# Altium PCB LEDMiniCube_PCB.PcbDoc (part 1 of 2)
Units mm, origin at the board's own origin, x right, y up, seen from the top; angles counter-clockwise.
Board outline 80 x 80 mm, 2 copper layers (Top Layer, Bottom Layer); 142 components, 145 nets, 574 pads, 515 vias.
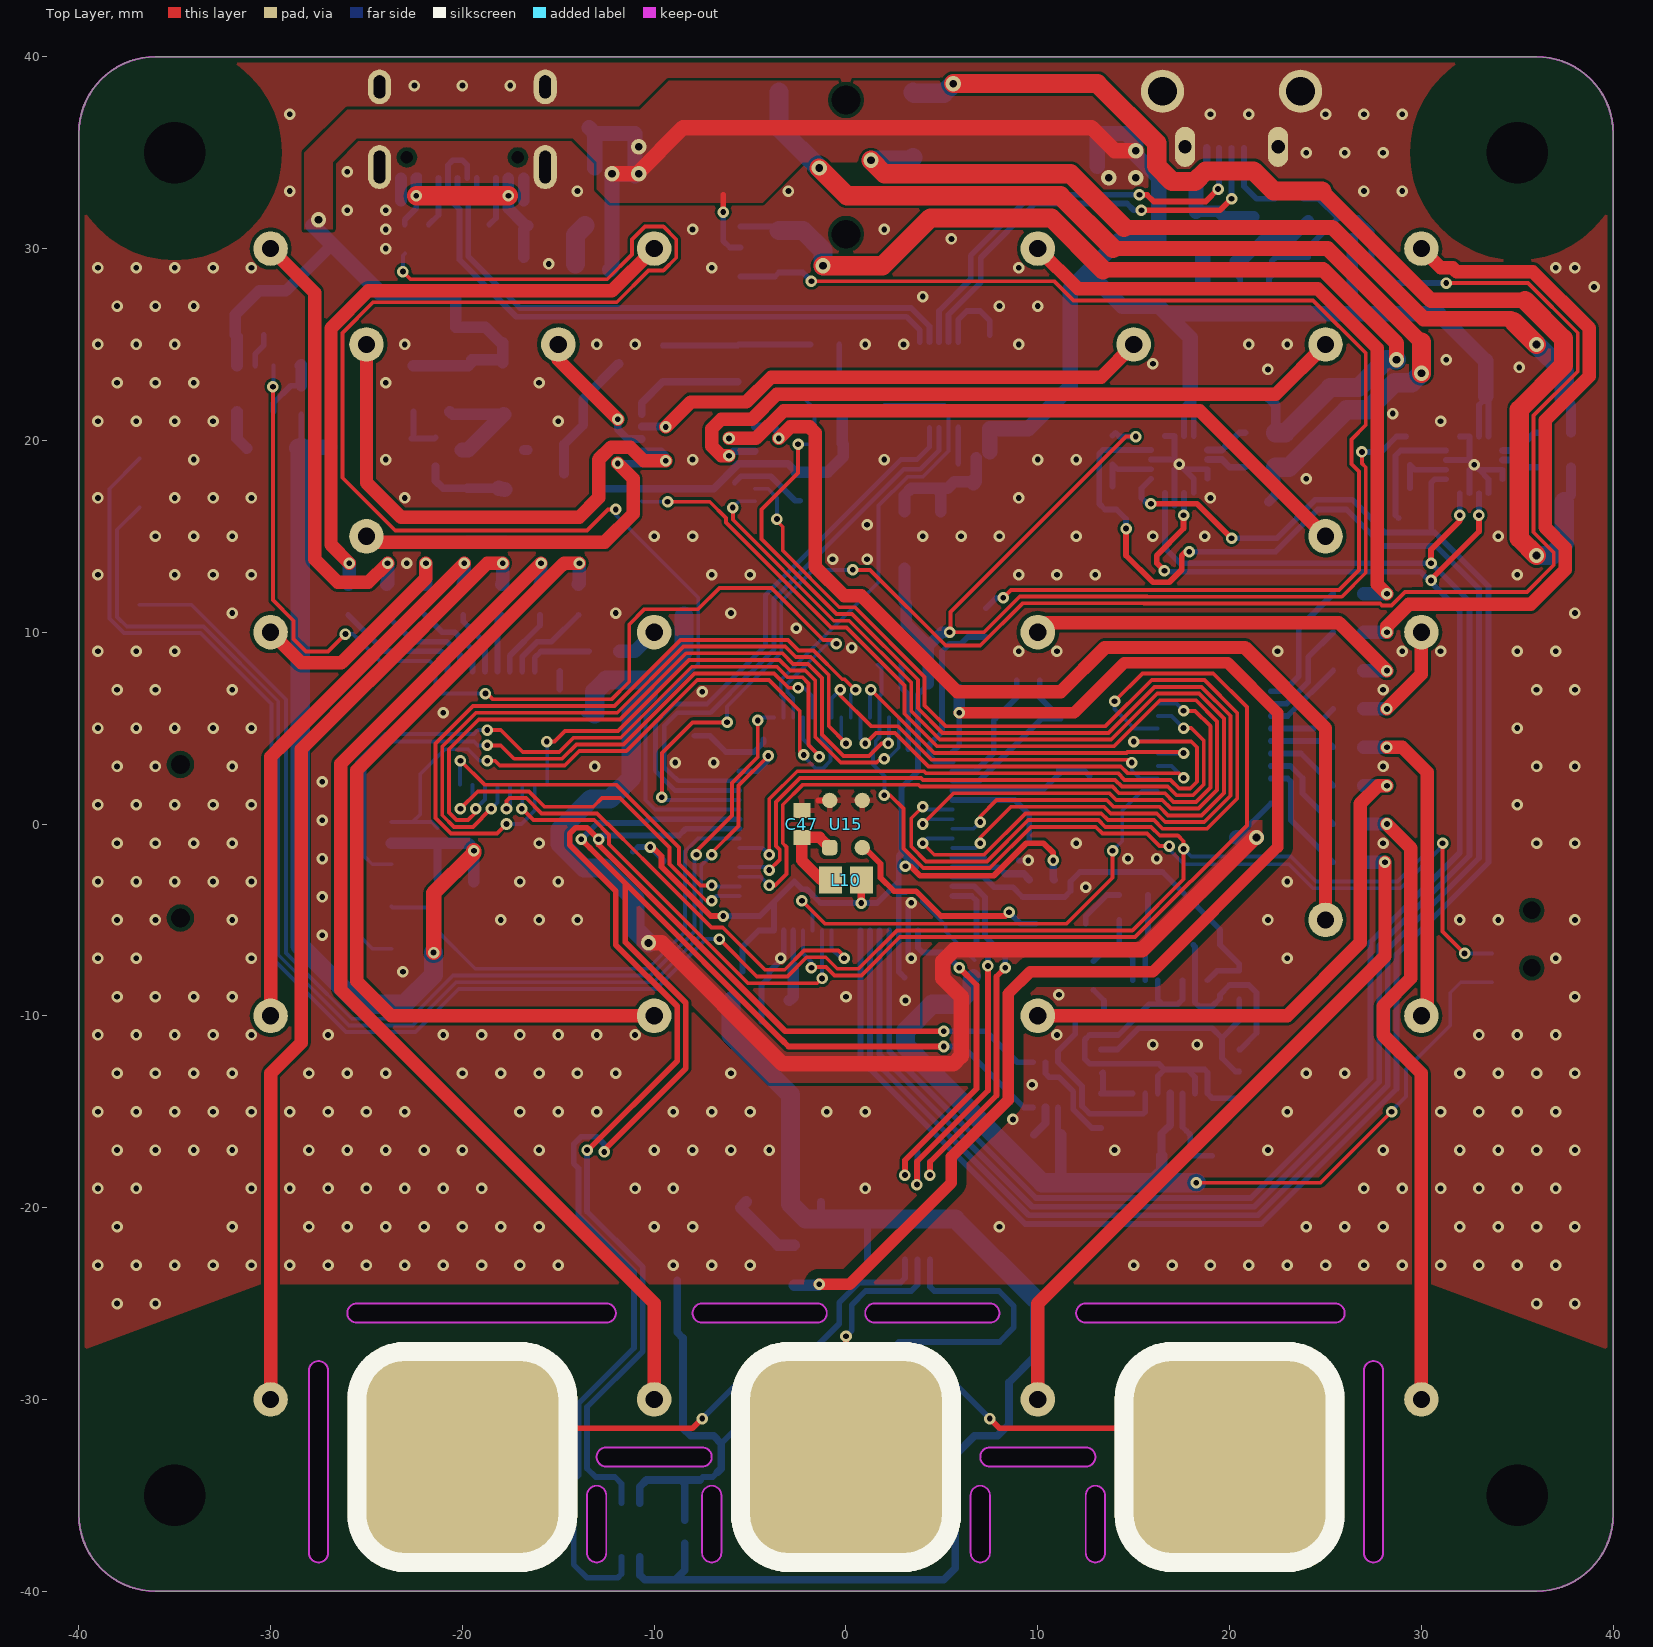
[diagram p0: Top Layer view]
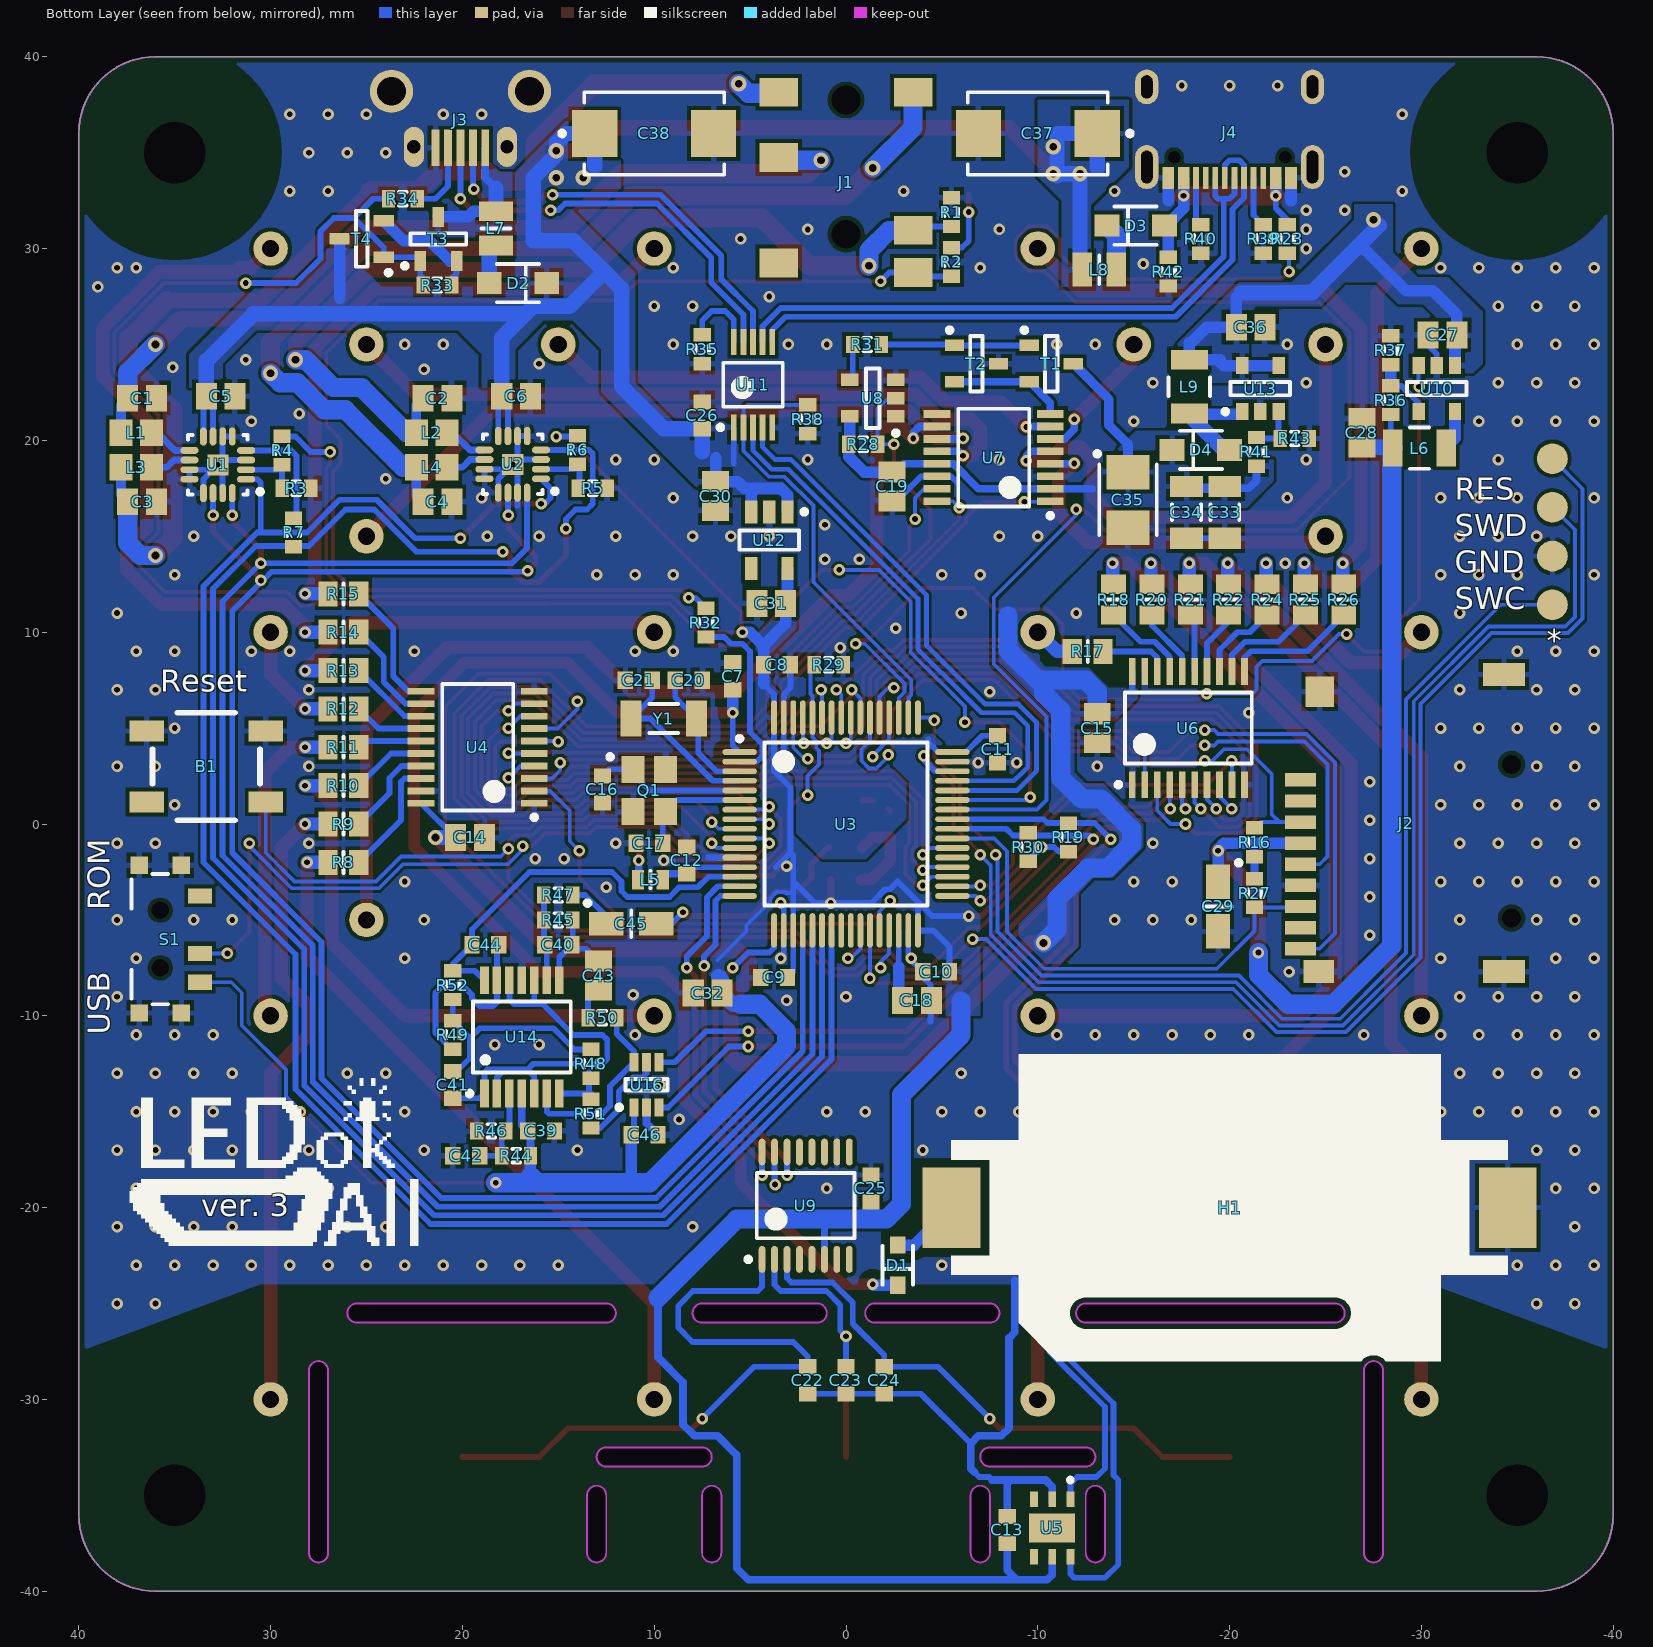
[diagram p1: Bottom Layer view, seen from below]

## Layer stack, top to bottom
Top Solder: solder mask 0.0102, Solder Resist, Dk 3.5
Top Layer: signal copper 0.0356
Dielectric 1: dielectric 0.32, FR-4, Dk 4.8
Bottom Layer: signal copper 0.0356
Bottom Solder: solder mask 0.0102, Solder Resist, Dk 3.5

## Board outline
-40,-36 ccw(c-36,-36) -36,-40 36,-40 ccw(c36,-36) 40,-36 40,36 ccw(c36,36) 36,40 -36,40 ccw(c-36,36) -40,36
cut-out: -28,-38 ccw(c-27.5,-38) -27,-38 -27,-28.5 ccw(c-27.5,-28.5) -28,-28.5
cut-out: 27,-38 ccw(c27.5,-38) 28,-38 28,-28.5 ccw(c27.5,-28.5) 27,-28.5
cut-out: -12.5,-33.5 cw(c-12.5,-33) -12.5,-32.5 -7.5,-32.5 cw(c-7.5,-33) -7.5,-33.5
cut-out: 7.5,-33.5 cw(c7.5,-33) 7.5,-32.5 12.5,-32.5 cw(c12.5,-33) 12.5,-33.5
cut-out: 1.5,-26 7.5,-26 ccw(c7.5,-25.5) 7.5,-25 1.5,-25 ccw(c1.5,-25.5)
cut-out: -7.5,-26 -1.5,-26 ccw(c-1.5,-25.5) -1.5,-25 -7.5,-25 ccw(c-7.5,-25.5)
cut-out: 12.5,-26 cw(c12.5,-25.5) 12.5,-25 25.5,-25 cw(c25.5,-25.5) 25.5,-26
cut-out: -25.5,-26 -12.5,-26 ccw(c-12.5,-25.5) -12.5,-25 -25.5,-25 ccw(c-25.5,-25.5)
cut-out: 12.5,-38 ccw(c13,-38) 13.5,-38 13.5,-35 ccw(c13,-35) 12.5,-35
cut-out: 6.5,-38 6.5,-35 cw(c7,-35) 7.5,-35 7.5,-38 cw(c7,-38)
cut-out: -7.5,-38 ccw(c-7,-38) -6.5,-38 -6.5,-35 ccw(c-7,-35) -7.5,-35
cut-out: -13.5,-38 -13.5,-35 cw(c-13,-35) -12.5,-35 -12.5,-38 cw(c-13,-38)

## Design rules (kind name [scope] priority, off if disabled: settings)
BoardOutlineClearance [All] p1: gap=0.3 ignorepadtopadclearanceinfootprint=FALSE except(0: Arc-SplitContinuation Track-SplitContinuation SMDPad-SplitContinuation THPad-SplitContinuation Via-SplitContinuation Fill-SplitContinuation Poly-SplitContinuation Region-SplitContinuation Text-SplitContinuation)
Clearance "Schematic Clearance Constraint_1" [InNet('NetD1_1')] p1: gap=0.15 ignorepadtopadclearanceinfootprint=FALSE except(0: Arc-Hole Track-Hole SMDPad-Hole THPad-Hole Via-Hole Fill-Hole Poly-Hole Region-Hole Text-Hole; 0.5: Arc-Fill Arc-Poly Arc-Region Track-Fill Track-Poly Track-Region SMDPad-Fill SMDPad-Poly SMDPad-Region THPad-Fill THPad-Poly THPad-Region Via-Fill Via-Poly Via-Region Fill-Fill Fill-Poly Fill-Region Poly-Poly Poly-Region Region-Region)
Clearance "Schematic Clearance Constraint" [InNet('NetC7_1')] p2: gap=0.15 ignorepadtopadclearanceinfootprint=FALSE except(0.5: Arc-Fill Arc-Poly Arc-Region Track-Fill Track-Poly Track-Region SMDPad-Fill SMDPad-Poly SMDPad-Region THPad-Fill THPad-Poly THPad-Region Via-Fill Via-Poly Via-Region Fill-Fill Fill-Poly Fill-Region Poly-Poly Poly-Region Region-Region)
Clearance Class5Clearance [InNetClass('Clearance5')] p3: gap=0.15 ignorepadtopadclearanceinfootprint=FALSE except(0: Arc-Hole Track-Hole SMDPad-Hole THPad-Hole Via-Hole Fill-Hole Poly-Hole Region-Hole Text-Hole; 0.5: Arc-Fill Arc-Poly Arc-Region Track-Fill Track-Poly Track-Region SMDPad-Fill SMDPad-Poly SMDPad-Region THPad-Fill THPad-Poly THPad-Region Via-Fill Via-Poly Via-Region Fill-Fill Fill-Poly Fill-Region Poly-Poly Poly-Region Region-Region)
Clearance HoleClearance [(HoleDiameter >= 3)] p4: gap=0.15 ignorepadtopadclearanceinfootprint=FALSE except(0: Arc-Hole Track-Hole SMDPad-Hole THPad-Hole Via-Hole Fill-Hole Poly-Hole Region-Hole Text-Hole; 0.2: SMDPad-Fill SMDPad-Poly SMDPad-Region; 4: THPad-Fill THPad-Poly THPad-Region)
Clearance [All] p5: gap=0.15 ignorepadtopadclearanceinfootprint=FALSE except(0: Arc-Hole Track-Hole SMDPad-Hole THPad-Hole Via-Hole Fill-Hole Poly-Hole Region-Hole Text-Hole; 0.2: SMDPad-Fill SMDPad-Poly SMDPad-Region THPad-Fill THPad-Poly THPad-Region)
ComponentClearance [All] p1: gap=0.2 collisioncheckmode=3 verticalgap=0.2 showdistances=FALSE
DiffPairsRouting [All] p1: maxlimit=1 minlimit=0.2 mostfreqgap=0.2 toplayer_minwidth=0.2 toplayer_maxwidth=0.3 toplayer_prefwidth=0.3 bottomlayer_minwidth=0.2 bottomlayer_maxwidth=0.3 bottomlayer_prefwidth=0.3 maxuncoupledlength=12.7
HoleSize [All] p1: absolutevalues=TRUE maxlimit=5 minlimit=0.3 maxpercent=80.000 minpercent=20.000
MinimumSolderMaskSliver [All] p1: minsoldermaskwidth=0.2
PlaneConnect [All] p1: planeconnectstyle=Relief reliefexpansion=0.3 reliefentries=4 reliefconductorwidth=0.3 reliefairgap=0.3
PolygonConnect MultiLayerPolygonConnect [OnMultiLayer] p1: connectstyle=Direct reliefconductorwidth=0.254 reliefentries=4 polygonreliefangle="90 Angle" airgapwidth=0.254
PolygonConnect ViaPolygonConnect [IsVia] p2: connectstyle=Direct reliefconductorwidth=0.254 reliefentries=4 polygonreliefangle="90 Angle" airgapwidth=0.254
PolygonConnect [All] p3: connectstyle=Relief reliefconductorwidth=0.3 reliefentries=4 polygonreliefangle="90 Angle" airgapwidth=0.2
RoutingVias [All] p1: holewidth=0.3 width=0.6 viastyle="Through Hole" minholewidth=0.3 minwidth=0.6 maxholewidth=5 maxwidth=5
SilkToSilkClearance [All] p1: silktosilkclearance=0
SilkToSolderMaskClearance [IsPad] p1: minsilkscreentomaskgap=0.1 clearancetoexposedcopper=TRUE
SolderMaskExpansion [All] p1: expansion=0.102
Width [All] p1: maxlimit=1 minlimit=0.15 preferedwidth=0.3
23 further rules are at their usual default settings.

## Classes and differential pairs
component class LEDMiniCube_AAmp: C1 C2 C3 C4 C5 C6 J1 L1 L2 L3 L4 R1 R2 R3 R4 R5 R6 R7 U1 U2
component class LEDMiniCube_Main: B1 C7 C8 C9 C10 C11 C12 C13 C14 C15 C16 C17 C18 C19 C20 C21 C22 C23 C24 C25 D1 H1 J2 L5 Q1 R8 R9 R10 R11 R12 R13 R14 R15 R16 R17 R18 R19 R20 R21 R22 R23 R24 R25 R26 R27 R28 R29 R30 R31 R32 S1 T1 T2 U3 U4 U5 U6 U7 U8 U9 Y1
component class LEDMiniCube_PowerAndAnalog: C26 C27 C28 C29 C30 C31 C32 C33 C34 C35 C36 C37 C38 C39 C40 C41 C42 C43 C44 C45 C46 C47 D2 D3 D4 J3 J4 L6 L7 L8 L9 L10 R33 R34 R35 R36 R37 R38 R39 R40 R41 R42 R43 R44 R45 R46 R47 R48 R49 R50 R51 R52 T3 T4 U10 U11 U12 U13 U14 U15 U16
net class Clearance5: NetC7_1 NetD1_1 Pad0 Pad1 Pad2
differential pair USB_D: +USB_D_P -USB_D_N

## Components (designator, comment, footprint, x,y, rotation, side; value= is the part's Value field where it differs from the comment)
B1 "Button 5.2" "Button 5.2x5.2" 33.35,3 r0 bottom
C1 "X" CAPC2012L 36.7,22.2 r0 bottom
C2 "X" CAPC2012L 21.3,22.2 r0 bottom
C3 "X" CAPC2012L 36.7,16.8 r180 bottom
C4 "X" CAPC2012L 21.3,16.8 r180 bottom
C5 "10u" CAPC2012L 32.6,22.3 r0 bottom
C6 "10u" CAPC2012L 17.2,22.3 r0 bottom
C7 "0.1u" CAPC1608L 5.9,7.7 r90 bottom
C8 "0.1u" CAPC1608L 3.6,8.3 r0 bottom
C9 "0.1u" CAPC1608L 3.75,-8 r180 bottom
C10 "0.1u" CAPC1608L -4.7,-7.7 r180 bottom
C11 "1u" CAPC1608L -7.9,3.9 r90 bottom
C12 "1u" CAPC1608L 8.3,-1.9 r270 bottom
C13 "0.1u" CAPC1608L -8.4,-36.8 r270 bottom
C14 "1u" CAPC2012L 19.6,-0.7 r0 bottom
C15 "1u" CAPC2012L -13.1,5 r90 bottom
C16 "20p" CAPC1608L 12.7,1.8 r270 bottom
C17 "20p" CAPC1608L 10.25,-1 r180 bottom
C18 "4u7" CAPC2012L -3.7,-9.2 r0 bottom
C19 "1u" CAPC2012L -2.4,17.6 r90 bottom
C20 "3p9" CAPC1608L 8.2,7.5 r0 bottom
C21 "3p9" CAPC1608L 10.8,7.5 r180 bottom
C22 "15p" CAPC1608L 2,-29 r90 bottom
C23 "15p" CAPC1608L 0,-29 r90 bottom
C24 "15p" CAPC1608L -2,-29 r90 bottom
C25 "0.1u" CAPC1608L -1.3,-19 r270 bottom
C26 "0.1u" CAPC1608L 7.5,21.3 r90 bottom
C27 "10u" CAPC2012L -31.1,25.5 r180 bottom
C28 "10u" CAPC2012L -26.9,20.4 r270 bottom
C29 "47u" CAPMP3216X180N -19.4,-4.3 r270 bottom
C30 "10u" CAPC2012L 6.8,17.1 r90 bottom
C31 "10u" CAPC2012L 3.9,11.5 r180 bottom
C32 "10u" CAPC2012L 7.215,-8.815 r180 bottom
C33 "10u" CAPC3216L -19.75,16.25 r90 bottom
C34 "10u" CAPC3216L -17.75,16.25 r90 bottom
C35 "47uF" CAPMP3528X120N -14.7,16.9 r270 bottom
C36 "10u" CAPC2012L -21.1,25.9 r0 bottom
C37 "150uF" CAPMP7343X200N -10,36 r0 bottom
C38 "150uF" CAPMP7343X200N 10,36 r180 bottom
C39 "0.1u" CAPC1608L 15.9,-16 r180 bottom
C40 "330p" CAPC1608L 15,-6.3 r180 bottom
C41 "0.1u" CAPC1608L 20.5,-13.6 r270 bottom
C42 "1u" CAPC1608L 19.8,-17.3 r180 bottom
C43 "1u" CAPC2012L 12.9,-7.9 r270 bottom
C44 "10n" CAPC1608L 18.8,-6.3 r0 bottom
C45 "2u2" CAPMP3216X180N 11.2,-5.2 r180 bottom
C46 "0.1u" CAPC1608L 10.5,-16.2 r0 bottom
C47 "1u" CAPC1608L -2.3,0 r270 top
D1 "BAT54" SOD-323F -2.7,-23 r270 bottom
D2 "SS24" SOD-123F 17.1,28.2 r180 bottom
D3 "SS24" SOD-123F -15.1,31.2 r0 bottom
D4 "SS24" SOD-123F -18.5,19.5 r0 bottom
H1 "CR2032" "Battery Holder cr2032" -20,-20 r90 bottom
J1 "PJ-3420-A-SMT" PJ-3420-A-SMT 0,40.25 r180 bottom
J2 "SD Card Socket" "XUNPU TF-115" -23.7,-2.1 r180 bottom
J3 "USB Con" ZX62D 20.1,40.35 r270 bottom
J4 "USB Type C" U262-161N-4BVC11 -20,34.25 r0 bottom
L1 "" INDC2012L 37,20.4 r0 bottom
L2 "" INDC2012L 21.6,20.4 r0 bottom
L3 "" INDC2012L 37,18.6 r0 bottom
L4 "" INDC2012L 21.6,18.6 r0 bottom
L5 "10u" IND_ABRACON_AISC-0603 10.2,-2.9 r180 bottom
L6 "2u2" IND_COILCRAFT_1206CS -29.9,19.6 r0 bottom
L7 "0.47u" IND_COILCRAFT_0805CS 18.25,31.05 r270 bottom
L8 "0.47u" IND_COILCRAFT_0805CS -13.2,28.9 r0 bottom
L9 "4u7" IND_COILCRAFT_1206CS -17.9,22.8 r270 bottom
L10 "10u" INDC2012L 0,-2.925 r0 top
Q1 "12MHz" XTAL_TXC_7M 10.25,1.75 r180 bottom
R1 "4k7" RESC1608L -5.5,31.9 r270 bottom
R2 "47k" RESC1608L -5.5,29.3 r270 bottom
R3 "X" RESC1608L 28.65,17.5 r180 bottom
R4 "X" RESC1608L 29.4,19.475 r90 bottom
R5 "X" RESC1608L 13.2,17.5 r180 bottom
R6 "X" RESC1608L 14,19.5 r90 bottom
R7 "210k" RESC1608L 28.8,15.2 r270 bottom
R8 "330" RESC2012L 26.2,-2 r0 bottom
R9 "330" RESC2012L 26.2,0 r0 bottom
R10 "330" RESC2012L 26.2,2 r0 bottom
R11 "330" RESC2012L 26.2,4 r0 bottom
R12 "330" RESC2012L 26.2,6 r0 bottom
R13 "330" RESC2012L 26.2,8 r0 bottom
R14 "330" RESC2012L 26.2,10 r0 bottom
R15 "330" RESC2012L 26.2,12 r0 bottom
R16 "10k" RESC1608L -21.3,-0.95 r270 bottom
R17 "330" RESC2012L -12.6,9 r0 bottom
R18 "330" RESC2012L -13.95,11.7 r90 bottom
R19 "4k7" RESC1608L -11.6,-0.7 r270 bottom
R20 "330" RESC2012L -15.95,11.7 r90 bottom
R21 "330" RESC2012L -17.95,11.7 r90 bottom
R22 "330" RESC2012L -19.95,11.7 r90 bottom
R23 "4k7" RESC1608L -23,30.5 r270 bottom
R24 "330" RESC2012L -21.95,11.7 r90 bottom
R25 "330" RESC2012L -23.95,11.7 r90 bottom
R26 "330" RESC2012L -25.95,11.7 r90 bottom
R27 "10k" RESC1608L -21.3,-3.6 r270 bottom
R28 "X" RESC1608L -0.9,19.8 r0 bottom
R29 "10k" RESC1608L 0.9,8.3 r180 bottom
R30 "4k7" RESC1608L -9.5,-1.2 r270 bottom
R31 "330" RESC1608L -1.1,25 r0 bottom
R32 "4k7" RESC1608L 7.3,10.5 r270 bottom
R33 "10k" RESC1608L 21.3,28.1 r0 bottom
R34 "1k" RESC1608L 23.1,32.6 r0 bottom
R35 "10k" RESC1608L 7.5,24.75 r270 bottom
R36 "680k" RESC1608L -28.4,22.1 r270 bottom
R37 "150k" RESC1608L -28.4,24.7 r270 bottom
R38 "10k" RESC1608L 2,21.1 r90 bottom
R39 "5k1" RESC1608L -21.75,30.5 r270 bottom
R40 "5k1" RESC1608L -18.5,30.5 r270 bottom
R41 "180k" RESC1608L -21.4,19.4 r270 bottom
R42 "10k" RESC1608L -16.8,28.8 r90 bottom
R43 "47k" RESC1608L -23.4,20.1 r0 bottom
R44 "47k" RESC1608L 17.2,-17.3 r180 bottom
R45 "47k" RESC1608L 15,-5 r180 bottom
R46 "47k" RESC1608L 18.5,-16 r180 bottom
R47 "4k7" RESC1608L 15,-3.7 r0 bottom
R48 "910" RESC1608L 13.3,-12.5 r90 bottom
R49 "240" RESC1608L 20.5,-11 r270 bottom
R50 "4k7" RESC1608L 12.7,-10.1 r180 bottom
R51 "4k7" RESC1608L 13.3,-15.1 r90 bottom
R52 "1k" RESC1608L 20.5,-8.4 r90 bottom
S1 "Switch" TA-3524A-A1 35.75,-6 r90 bottom
T1 "BC817" SOT95P230X110-3N -10.7,24 r180 bottom
T2 "BC807" SOT95P230X110-3N -6.8,24 r180 bottom
T3 "IRLML6402PBF" SOT95P237X112-3N 21.25,30.5 r90 bottom
T4 "IRLML6402PBF" SOT95P237X112-3N 25.25,30.5 r0 bottom
U1 "MAX98357" PQFN50P300X300X80_HS-17N 32.75,18.725 r0 bottom
U2 "MAX98357" PQFN50P300X300X80_HS-17N 17.375,18.75 r0 bottom
U3 "STM32F412RET6" STM-LQFP64_N 0,0 r180 bottom
U4 "MM74HCT541MTCX" TSOP65P640X120-20N 19.2,4 r0 bottom
U5 "HDC1080" "WSON HDC1080" -10.75,-36.7 r270 bottom
U6 "MM74HCT541MTCX" TSOP65P640X120-20N -17.85,5 r90 bottom
U7 "ADG708" TSOP65P640X110-16N -7.7,19.1 r0 bottom
U8 "SN74LVC1G17" SOT23-5AL -1.4,22.2 r0 bottom
U9 "TTP224B" SOP65P640-16L 2.1,-19.9 r90 bottom
U10 "MT9216" SOT23-5AL -30.8,22.7 r270 bottom
U11 "BL1532" TSSOP50P490X110-10N 4.85,22.9 r90 bottom
U12 "LP5907-3.3" SOT95P280X145-5M 4,14.8 r270 bottom
U13 "MT3540" SOT23-5AL -21.6,22.7 r90 bottom
U14 "GS8724" SOP65P640X120-14N 16.9,-11.1 r90 bottom
U15 "Microphone" "Microphone 3.76x2.95" 0,0 r180 top
U16 "MCP4017" SOT65P210X110-6M 10.4,-13.6 r90 bottom
Y1 "32.768KHZ" XTAL_ABRACON_ABS09 9.5,5.5 r0 bottom

## Footprints (in the part's own frame and the unit in brackets; to place one, negate y for a bottom-side part, rotate by r counter-clockwise, add the part's x,y. Pads: shape width x height; smd on the part's side, far side on the other; paste and mask are expansions set on the pad)
"Battery Holder cr2032" [mm]
  rect 4.2x3 smd: 1(0,14.5) 2(0,-14.5)
  silkscreen extent -3.5,-14.5 3.5,14.5
"Button 5.2x5.2" [mm]
  rect 1.8x1.1 smd: 1(-3.1,1.85) 2(3.1,1.85) 3(-3.1,-1.85) 4(3.1,-1.85)
  silkscreen extent -2.8,-2.8 2.8,2.8
CAPC1608L [mm] "Chip Capacitor, Body 1.6x0.8mm, IPC High Density"
  rect 0.8x0.9 smd: 1(-0.7,0) 2(0.7,0)
  body extent -0.87,-0.48 0.87,0.48, height 0.85
CAPC2012L [mm] "Chip Capacitor, Body 2.0x1.3mm, IPC High Density"
  rect 1.1x1.4 smd: 1(-0.75,0) 2(0.75,0)
  body extent -1.1,-0.72 1.1,0.72, height 1.1
CAPC3216L [mm] "Chip Capacitor, Body 3.2x1.6mm, IPC High Density"
  rect 1.1x1.7 smd: 1(-1.35,0) 2(1.35,0)
  silkscreen extent -0.4,-0.75 0.4,0.75, body extent -1.7,-0.9 1.7,0.9, height 1.35
CAPMP3216X180N [mm] "Capacitor, Polarized, Molded  Body 3.2x1.6mm, IPC Medium Density"
  rect 1.8x1.25 smd: 1(-1.3,0) 2(1.3,0)
  silkscreen extent -2.4,-0.7 0,1.2, body extent -1.7,-0.9 1.7,0.9, height 1.6
CAPMP3528X120N [mm] "Capacitor, Polarized, Molded  Body 3.5x2.8mm, IPC Medium Density"
  rect 1.8x2.25 smd: 1(-1.45,0) 2(1.45,0)
  silkscreen extent -2.52,-1.73 1.85,1.5, body extent -1.85,-1.5 1.85,1.5, height 1.2
CAPMP7343X200N [mm] "Capacitor, Polarized, Molded  Body 7.3x4.3mm, IPC Medium Density"
  rect 2.35x2.45 smd: 1(-3.1,0) 2(3.1,0)
  silkscreen extent -4.92,-2.15 3.65,2.15, body extent -3.8,-2.3 3.8,2.3, height 2
IND_ABRACON_AISC-0603 [mm] "Inductor, Molded Body; 1.8mm L X 1.12mm W, AISC-0603 Series"
  rect 0.64x1.02 smd: 1(-0.64,0) 2(0.64,0)
  silkscreen extent 0,-0.45 0,0.45, body extent -0.9,-0.56 0.9,0.56, height 1
IND_COILCRAFT_0805CS [mm] "SMD Inductor  Body Width 1.73mm Body Lenght 2.29mm Height 1.52mm, 0805CS Series"
  rect 1.02x1.78 smd: 1(-0.89,0) 2(0.89,0)
  silkscreen extent 0,-0.75 0,0.75, body extent -1.14,-0.86 1.14,0.86, height 1.52
IND_COILCRAFT_1206CS [mm] "SMD Inductor  Body Width 2.16mm Body Lenght 3.56mm Height 1.52mm, 1206CS Series"
  rect 1.02x1.93 smd: 1(-1.4,0) 2(1.4,0)
  silkscreen extent -0.49,-1.08 0.49,1.08, body extent -1.78,-1.08 1.78,1.08, height 1.51
INDC2012L [mm] "Chip Inductor, Body 2.0x1.2mm, IPC High Density"
  rect 1.2x1.4 smd: 1(-0.8,0) 2(0.8,0)
  body extent -1.1,-0.7 1.1,0.7, height 1.1
"Microphone 3.76x2.95" [mm]
  rrect50% 0.8x0.8 smd: 1(0.85,1.23)
  round 0.8 smd: 2(0.85,-1.23) 3(-0.85,-1.23) 4(-0.85,1.23)
PJ-3420-A-SMT [mm]
  rect 2x1.5 smd: 1(-3.5,-2.1) 2(3.5,-2.1) 3(-3.5,-5.5) 4(3.5,-9.3) 5(3.5,-11.5) 6(-3.5,-11)
  round 0 hole 1.5 unplated: 8(0,-2.5) 9(0,-9.5)
PQFN50P300X300X80_HS-17N [mm] "PQFN, 16-Leads, Body 3,00x3,00mm, Pitch 0,50mm, Thermal Pad 1,10x1,10mm, IPC Medium Density"
  oval 0.95x0.35 smd: 1(-1.475,0.75) 2(-1.475,0.25) 3(-1.475,-0.25) 4(-1.475,-0.75) 9(1.475,-0.75) 10(1.475,-0.25) 11(1.475,0.25) 12(1.475,0.75)
  oval 0.35x0.95 smd: 5(-0.75,-1.475) 6(-0.25,-1.475) 7(0.25,-1.475) 8(0.75,-1.475) 13(0.75,1.475) 14(0.25,1.475) 15(-0.25,1.475) 16(-0.75,1.475)
  rect 1.1x1.1 smd: 17(0,0)
  silkscreen extent -2.32,-1.55 1.55,1.55, body extent -1.55,-1.55 1.55,1.55, height 0.8
RESC1608L [mm] "Chip Resistor, Body 1.6x0.8mm, IPC High Density"
  rect 0.7x0.9 smd: 1(-0.75,0) 2(0.75,0)
  silkscreen extent -0.2,-0.35 0.2,0.35, body extent -0.85,-0.48 0.85,0.48, height 0.6
RESC2012L [mm] "Chip Resistor, Body 2.0x1.3mm, IPC High Density"
  rect 1x1.3 smd: 1(-0.8,0) 2(0.8,0)
  silkscreen extent 0,-0.55 0,0.55, body extent -1.07,-0.7 1.07,0.7, height 0.65
SOD-123F [mm] "SODFL, 2-Leads, Body 1,80x3,65mm, IPC Medium Density"
  rect 1.3x1.15 smd: 1(-1.5,0) 2(1.5,0)
  silkscreen extent -1.1,-1 1.1,1, body extent -1.45,-0.95 1.45,0.95, height 1.1
SOD-323F [mm]
  rect 0.9x0.8 smd: 1(-1.05,0) 2(1.05,0)
  silkscreen extent -1,-0.8 1,0.8
SOP65P640-16L [mm] "SOP, 16-Leads, Body 5x4.4mm, Pitch 0.65mm, IPC High Density"
  oval 1.4x0.35 smd: 1(-2.8,2.275) 2(-2.8,1.625) 3(-2.8,0.975) 4(-2.8,0.325) 5(-2.8,-0.325) 6(-2.8,-0.975) 7(-2.8,-1.625) 8(-2.8,-2.275) 9(2.8,-2.275) 10(2.8,-1.625) 11(2.8,-0.975) 12(2.8,-0.325) 13(2.8,0.325) 14(2.8,0.975) 15(2.8,1.625) 16(2.8,2.275)
  silkscreen extent -2.92,-2.55 1.7,3.13, body extent -2.25,-2.55 2.25,2.55, height 2
SOP65P640X120-14N [mm] "SOP, 14-Leads, Body 5.1x4.5mm (max), Pitch 0.65mm, IPC Medium Density"
  rect 1.45x0.45 smd: 1(-2.95,1.95) 2(-2.95,1.3) 3(-2.95,0.65) 4(-2.95,0) 5(-2.95,-0.65) 6(-2.95,-1.3) 7(-2.95,-1.95) 8(2.95,-1.95) 9(2.95,-1.3) 10(2.95,-0.65) 11(2.95,0) 12(2.95,0.65) 13(2.95,1.3) 14(2.95,1.95)
  silkscreen extent -3.07,-2.55 1.85,2.85, body extent -3.12,-2.55 3.12,2.55, height 1.2
SOT23-5AL [mm] "SOT23, 5-Leads, Body 2.9x1.6mm, Pitch 0.95mm, Lead Span 2.8mm, IPC High Density"
  rect 0.9x0.65 smd: 1(-1.2,0.95) 2(-1.2,0) 3(-1.2,-0.95) 4(1.2,-0.95) 5(1.2,0.95)
  silkscreen extent -1.32,-1.55 0.35,1.95, body extent -0.9,-1.55 0.9,1.55, height 1.45
SOT65P210X110-6M [mm] "SOT23, 6-Leads, Body 2,00x2,10mm, Pitch 0,65mm, IPC Low Density"
  rect 0.95x0.45 smd: 1(-1.175,0.65) 2(-1.175,0) 3(-1.175,-0.65) 4(1.175,-0.65) 5(1.175,0) 6(1.175,0.65)
  silkscreen extent -1.3,-1.1 0.3,1.55, body extent -0.7,-1.07 0.7,1.08, height 1.1
SOT95P230X110-3N [mm] "SOT23, 3 pin, Pitch 0.95mm - 1.3mm W X 2.9mm L X 1.1mm H, IPC Medium Density"
  rect 1x0.6 smd: 1(-1.15,0.95) 2(-1.15,-0.95) 3(1.15,0)
  silkscreen extent -1.53,-1.45 0.33,1.87, body extent -1.08,-1.5 1.25,1.5, height 1.1
SOT95P237X112-3N [mm] "SOT, 0.95mm, pitch; 3 pin,1.30mm W X 2.92mm L X 1.12mm H body, IPC Medium Density"
  rect 1.05x0.6 smd: 1(-1.15,0.95) 2(-1.15,-0.95) 3(1.15,0)
  silkscreen extent -1.52,-1.45 0.3,1.88, body extent -1.25,-1.5 1.25,1.5, height 1.1
SOT95P280X145-5M [mm] "SOT23, 5-Leads, Body 2,90x2,80mm, Pitch 0,95mm, IPC Low Density"
  rect 1.2x0.65 smd: 1(-1.475,0.95) 2(-1.475,0) 3(-1.475,-0.95) 4(1.475,-0.95) 5(1.475,0.95)
  silkscreen extent -1.6,-1.55 0.5,1.95, body extent -0.88,-1.52 0.87,1.53, height 1.45
STM-LQFP64_N [mm] "Thin QFP, 64-Leads, Body 10x10mm, Pitch 0.5mm, IPC Medium Density"
  oval 1.8x0.3 smd: 1(-5.55,3.75) 2(-5.55,3.25) 3(-5.55,2.75) 4(-5.55,2.25) 5(-5.55,1.75) 6(-5.55,1.25) 7(-5.55,0.75) 8(-5.55,0.25) 9(-5.55,-0.25) 10(-5.55,-0.75) 11(-5.55,-1.25) 12(-5.55,-1.75) 13(-5.55,-2.25) 14(-5.55,-2.75) 15(-5.55,-3.25) 16(-5.55,-3.75) 33(5.55,-3.75) 34(5.55,-3.25) 35(5.55,-2.75) 36(5.55,-2.25) 37(5.55,-1.75) 38(5.55,-1.25) 39(5.55,-0.75) 40(5.55,-0.25) 41(5.55,0.25) 42(5.55,0.75) 43(5.55,1.25) 44(5.55,1.75) 45(5.55,2.25) 46(5.55,2.75) 47(5.55,3.25) 48(5.55,3.75)
  oval 0.3x1.8 smd: 17(-3.75,-5.55) 18(-3.25,-5.55) 19(-2.75,-5.55) 20(-2.25,-5.55) 21(-1.75,-5.55) 22(-1.25,-5.55) 23(-0.75,-5.55) 24(-0.25,-5.55) 25(0.25,-5.55) 26(0.75,-5.55) 27(1.25,-5.55) 28(1.75,-5.55) 29(2.25,-5.55) 30(2.75,-5.55) 31(3.25,-5.55) 32(3.75,-5.55) 49(3.75,5.55) 50(3.25,5.55) 51(2.75,5.55) 52(2.25,5.55) 53(1.75,5.55) 54(1.25,5.55) 55(0.75,5.55) 56(0.25,5.55) 57(-0.25,5.55) 58(-0.75,5.55) 59(-1.25,5.55) 60(-1.75,5.55) 61(-2.25,5.55) 62(-2.75,5.55) 63(-3.25,5.55) 64(-3.75,5.55)
  silkscreen extent -5.68,-4.25 4.25,4.57, body extent -5,-5 5,5, height 1.6
TA-3524A-A1 [mm]
  rect 0.8x1.25 smd: 1(-2.25,-2.075) 2(-0.75,-2.075) 3(2.25,-2.075)
  rect 0.9x0.9 smd: 4(-3.85,-1.1) 5(-3.85,1.1) 6(3.85,-1.1) 7(3.85,1.1)
  rect 0x0 hole 0.9 unplated: 8(-1.5,0) 9(1.5,0)
  silkscreen extent -3.4,-0.4 3.4,1.5
TSOP65P640X110-16N [mm] "TSOP, 16-Leads, Body 5,00x4,40mm, Pitch 0,65mm, IPC Medium Density"
  rect 1.4x0.4 smd: 1(-2.95,2.275) 2(-2.95,1.625) 3(-2.95,0.975) 4(-2.95,0.325) 5(-2.95,-0.325) 6(-2.95,-0.975) 7(-2.95,-1.625) 8(-2.95,-2.275) 9(2.95,-2.275) 10(2.95,-1.625) 11(2.95,-0.975) 12(2.95,-0.325) 13(2.95,0.325) 14(2.95,0.975) 15(2.95,1.625) 16(2.95,2.275)
  silkscreen extent -3.07,-2.55 1.85,3.15, body extent -2.25,-2.55 2.25,2.55, height 1.1
TSOP65P640X120-20N [mm] "TSOP, 20-Leads, Body 6,50x4,40mm, Pitch 0,65mm, IPC Medium Density"
  rect 1.4x0.35 smd: 1(-2.95,2.925) 2(-2.95,2.275) 3(-2.95,1.625) 4(-2.95,0.975) 5(-2.95,0.325) 6(-2.95,-0.325) 7(-2.95,-0.975) 8(-2.95,-1.625) 9(-2.95,-2.275) 10(-2.95,-2.925) 11(2.95,-2.925) 12(2.95,-2.275) 13(2.95,-1.625) 14(2.95,-0.975) 15(2.95,-0.325) 16(2.95,0.325) 17(2.95,0.975) 18(2.95,1.625) 19(2.95,2.275) 20(2.95,2.925)
  silkscreen extent -3.07,-3.3 1.85,3.77, body extent -2.25,-3.3 2.25,3.3, height 1.2
TSSOP50P490X110-10N [mm] "TSSOP, 10-Leads, Body 3,00x3,00mm, Pitch 0,50mm, IPC Medium Density"
  rect 1.35x0.3 smd: 1(-2.225,1) 2(-2.225,0.5) 3(-2.225,0) 4(-2.225,-0.5) 5(-2.225,-1) 6(2.225,-1) 7(2.225,-0.5) 8(2.225,0) 9(2.225,0.5) 10(2.225,1)
  silkscreen extent -2.35,-1.55 1.15,1.83, body extent -1.55,-1.55 1.55,1.55, height 1.1
U262-161N-4BVC11 [mm]
  round 0 hole 0.65 unplated: 15(-2.89,-0.5) 16(2.89,-0.5)
  rect 0.6x1.15 smd: A1B12(-3.2,0.575) A4B9(-2.4,0.575) B1A12(3.2,0.575) B4A9(2.4,0.575)
  rect 0.3x1.15 smd: A5(-1.25,0.575) A6(-0.25,0.575) A7(0.25,0.575) A8(1.25,0.575) B5(1.75,0.575) B6(0.75,0.575) B7(-0.75,0.575) B8(-1.75,0.575)
  oval 1.2x2.3 hole 0.6 slot 1.7 at 90 deg: S1(-4.32,0) S2(4.32,0)
  oval 1.2x1.8 hole 0.6 slot 1.2 at 90 deg: S3(4.32,-4.18) S4(-4.32,-4.18)
"WSON HDC1080" [mm]
  rect 0.8x0.4 smd: 1(-1.5,0.95) 2(-1.5,0) 3(-1.5,-0.95) 4(1.5,-0.95) 5(1.5,0) 6(1.5,0.95)
  rect 1.5x2.4 smd: 7(0,0)
  silkscreen extent -2.6,0.85 -2.4,1.05
XTAL_ABRACON_ABS09 [mm] "2 Pins, 4.1x1.5mm, SMD Low Profile Crystal, ABS09 Series"
  rect 1.1x1.9 smd: 1(-1.7,0) 2(1.7,0)
  silkscreen extent -0.75,-0.75 0.75,0.75, body extent -2.05,-0.75 2.05,0.75, height 0.9
XTAL_TXC_7M [mm] "4 Pins, 2.5x3.2mm, SMD Sealing Crystal, 7M Serie"
  rect 1.2x1.4 smd: 1(-0.85,1.1) 2(-0.85,-1.1) 3(0.85,-1.1) 4(0.85,1.1)
  silkscreen extent -2.18,1.63 -1.93,1.87, body extent -1.25,-1.6 1.25,1.6, height 0.8
"XUNPU TF-115" [mm] "SD CARD SOCKET"
  rect 1.6x0.7 smd: 1(0,4.4) 2(0,3.3) 3(0,2.2) 4(0,1.1) 5(0,0) 6(0,-1.1) 7(0,-2.2) 8(0,-3.3) CD(0,-4.4)
  rect 1.6x1.2 smd: 10(0.95,-5.6)
  rect 1.5x1.6 smd: 11(1,9)
  round 0 hole 1 unplated: 12(11,-2.8) 13(11,5.2)
  rect 2.2x1.2 smd: 14(10.6,-5.6) 15(10.6,9.9)
ZX62D [mm]
  rect 1.9x0.4 smd mask-0.675: 1(5.1,1.3) 2(5.1,0.65) 3(5.1,0) 4(5.1,-0.65) 5(5.1,-1.3)
  round 2.25 hole 1.5: S1(2.15,-3.6) S2(2.15,3.6)
  oval 2.1x1.05 hole 0.7: S3(5.05,2.425) S4(5.05,-2.425)
  Mechanical 10 keep-out region: 0,3.75 1.4,3.75 1.4,-3.75 0,-3.75
  Mechanical 10 keep-out region: 1.4,2.85 2.9,2.85 2.9,-2.85 1.4,-2.85
  Mechanical 10 keep-out region: 2.9,3.75 4.1,3.75 4.1,-3.75 2.9,-3.75

## Part data
C1 C2 C3 C4 C5 C6 C7 C8 C9 C10 C11 C12 C13 C14 C15 C16 C17 C18 C19 C20 C21 C22 C23 C24 C25 C26 C27 C28 C30 C31 C32 C33 C34 C36 C39 C40 C41 C42 C43 C44 C46 C47: library part Capacitor
C29 C45: library part CTE3216-18_100UF_6.3V_20%_ESR0500_AVX_TLJ, "Polarised capacitor", Case=A, Manufacturer=AVX, Manufacturer Part Number=TLJA107M006R0500, Tolerance=±20%, Voltage=6.3V, Author="CERN DEM JLC", ComponentHeight=1.8mm, Component Type=Standard, CreateDate=19.12.2013, HelpURL=\\cern.ch\dfs\Applications\Altium\Datasheets\CTE_AVX_TLJ.pdf, LatestRevisionDate=19.12.2013, Mounted=Yes, Part Description="ESR 0R5 Solid Tantalum Chip Capacitor", Part Number=CTE3216-18_100UF_6.3V_20%_ESR0500_AVX_TLJ, Pin Count=2, Sense=No, SMD=Yes, Socket=No, Status=None
C35: library part CTE3528-12_47UF_10V_20%_PANASONIC_TPG, "Polarised capacitor", Case=B, Voltage=10V, Author="CERN DEM JLC"
C37 C38: library part CAEM7343-20_150UF_2V_20%_LESR0009, "Polarised capacitor", Voltage=6.3V, Author="CERN DEM JLC"
D1 D2 D3 D4: library part Schotky
  D1: Name=BAT54
  D2 D3 D4: Name=SS24
J1: library part "3.5 socket PJ-3420-A-SMT", Name=PJ-3420-A-SMT
J3: library part USB, Datasheet=https://media.digikey.com/pdf/Data%20Sheets/Hirose%20PDFs/ZX62D-AB-5P8%20RoHS.pdf
J4: library part USB_TypeC, Name="USB Type C", Part=U262-161N-4BVC11
L1 L2 L3 L4 L7 L8: library part IND_150NH_2%_COILCRAFT_0805CS, "Inductor With Core", Author="CERN DEM JLC"
L5: library part IND_390NH_5%_ABRACON_AISC-0603, "Inductor", Author="CERN DEM JLC"
L6 L9 L10: library part IND_620NH_5%_COILCRAFT_1206CS, "Inductor With Core", Author="CERN DEM JLC"
Q1: library part XTAL_12MHZ_TXC_7M-12.000MAAJ-T, "Crystal 4 pins 1=XTAL Control 2=GND3=XTAL 4=GND", Manufacturer="TXC CORPORATION", Manufacturer Part Number=7M-12.000MAAJ-T, Author="CERN DEM JLC", Bonding=No, ComponentHeight=0.8mm, Component Type=Standard, CreateDate=19.06.2012, HelpURL=\\cern.ch\dfs\Applications\Altium\Datasheets\XTAL_TXC_7M.pdf, LatestRevisionDate=19.06.2012, Mounted=Yes, PackageDescription="4 Pins, 2.5x3.2mm, SMD Sealing Crystal, 7M Serie", Part Description="±30ppm 18pF -20°C to +70°C  4 Pins, 3.2x2.5X0.8mm, SMD Sealing Crystal, 7M Series", Part Number=XTAL_12MHZ_TXC_7M-12.000MAAJ-T, Pin Count=4, PressFit=No, Sense=No, SMD=Yes, Socket=No
R1 R2 R3 R4 R5 R6 R7 R8 R9 R10 R11 R12 R13 R14 R15 R16 R17 R18 R19 R20 R21 R22 R23 R24 R25 R26 R27 R28 R29 R30 R31 R32 R33 R34 R35 R36 R37 R38 R39 R40 R41 R42 R43 R44 R45 R46 R47 R48 R49 R50 R51 R52: library part Resistor
T1: "NPN Transistor", Part Number=BC817-40, Author="CERN DEM JLC", Device=BC817
T2: library part BC807-25, "PNP Transistor", Part Number=BC807-40, Author="CERN DEM JLC", Device=BC807
T3 T4: "P-CHANNEL MOSFET WITH ZENER DIODE", Author="CERN DEM JLC", Device=IRLML6402PBF, Part Number=IRLML6402PBF
U3: library part STM32F401RBT6, "ARM Cortex-M4 32-bit MCU+FPU, 105 DMIPS, 128 kB Flash, 64 kB Internal RAM, 48 I/Os, 64-pin LQFP, -40 to 85 degC, Tray", PartNumber=STM32F412RET6
U4 U6: library part 74541, "Octal Buffer/Line Driver with 3-State Outputs", Device=MM74HCT541MTCX
U8: library part SN74LVC1G04, Name=SN74LVC1G17, Part=SN74LVC1G17DBVR
U9: library part TTP224, Name=TTP224B
U10: library part LM3671, Name=MT9216
U12: library part TLV70233, Name=LP5907-3.3, Part=LP5907MFX-3.3/NOPB
U13: library part TPS6104x, Name=MT3540
U14: library part AD8624ARUZ, "Quad Operational Amplifier", Part Number=GS8624-TR, Author="CERN DEM JLC", Device=GS8724
U15: library part "Microphone MEMS", Name=Microphone
Y1: library part XTAL_32.768KHZ_ABRACON_ABS09-32.768KHZ-T, "Quartz Crystal", Manufacturer=ABRACON, Manufacturer Part Number=ABS09-32.768KHZ-T, Author="CERN DEM JLC", Bonding=No, ComponentHeight=0.9mm, Component Type=Standard, CreateDate=16.10.2014, HelpURL=\\cern.ch\dfs\Applications\Altium\Datasheets\XTAL_ABRACON_ABS09.pdf, LatestRevisionDate=16.10.2014, Mounted=Yes, PackageDescription="2 Pins, 4.1x1.5mm, SMD Low Profile Crystal, ABS09 Serie", Part Description="Tolerance: ±20ppm, Stability: ±5ppm, -40°C to +85°C, 12.5pF, SMD Low Profile Crystal, ABS09 Series", Part Number=XTAL_32.768KHZ_ABRACON_ABS09-32.768KHZ-T, Pin Count=2, PressFit=No, Sense=No, SMD=Yes, Socket=No
H1: Name=CR2032
J2: Name="SD Card Socket"
S1: Name=Switch
U1 U2: Name=MAX98357, Part=MAX98357A
U5: Name=HDC1080
U7: Name=ADG708, Part=ADG708BRUZ
U11: Name=BL1532
U16: Name=MCP4017

## Free pads (board coordinates)
  round 1.8 hole 0.9: 1(-30,-30) 2(-10,-30) 3(10,-30) 4(30,-30) 5(-30,-10) 6(-10,-10) 7(10,-10) 8(30,-10) 9(-30,10) 10(-10,10) 11(10,10) 12(30,10) 13(-30,30) 14(-10,30) 15(10,30) 16(30,30) 18(-25,15) 19(-25,25) 20(-15,25) 21(15,25) 22(25,25) 23(25,15) 24(25,-5)
  round 1.8 hole 3.2 unplated: 25(-35,-35) 26(35,-35) 27(35,35) 28(-35,35)
  rrect50% 12x12 smd: 29(-20,-33) 30(0,-33) 31(20,-33)
  round 1.6 smd far side: 32(-36.83,19.05) 33(-36.83,16.51) 34(-36.83,13.97) 35(-36.83,11.43)

## Via types
v1: diameter 0.6, hole 0.3, Top Layer to Bottom Layer, tented both sides, 496 vias
v2: diameter 0.8, hole 0.4, Top Layer to Bottom Layer, tented both sides, 17 vias
v3: diameter 0.6, hole 0.3, Top Layer to Bottom Layer, tented top, 2 vias

## Nets (pads, with @x,y where several pads share a name; then routed paths per layer and width w, separated by ;. In a path a pad name is that pad's centre, name@x,y a point inside that pad or via, vN(x,y) a via of type N, cw(c..) or ccw(c..) an arc to the next point about the centre after c; other vN are vias at no path point)
3SDVCC: C28.2 C29.1 J2.4 L6.2 R16.2 R27.1 R36.2 | length 53.5
  Top Layer w0.8: v1(-21.5,-6.7) -21.5,-3.6 -19.4,-1.5 v1(-19.4,-1.4)
  Bottom Layer w0.3: L6.2@-28.4,19.75 R36.2@-28.4,21.35
  Bottom Layer w0.4: R27.1@-21.3,-2.85 -21.3,-1.05
  Bottom Layer w0.6: J2.4@-23.7,-1 -19.7,-1 -19.4,-1.3 v1(-19.4,-1.4) C29.1@-19.4,-3
  Bottom Layer w0.8: L6.2@-28.55,19.6 L6.2@-28.5,19.65 ; L6.2@-28.4,19.75 L6.2@-28.5,19.65 ; C28.2@-26.9,19.65 L6.2@-28.5,19.65
  Bottom Layer w1: L6.2@-28.55,19.6 -28.45,19.5 -28.45,6.811 -28.45,-6.35 -25.4,-9.4 -23.041,-9.4 -21.5,-7.859 v1(-21.5,-6.7)
3VCC: C8.2 C9.2 C10.2 C11.2 C13.2 C25.2 C31.2 C32.2 C39.1 C46.2 L5.1 L10.2 R4.2 R6.2 R19.2 R30.2 R44.2 S1.1 U3.19 U3.32 U3.48 U3.64 U5.5 U9.6 U12.5 U14.4 U16.1 | length 238.1
  Top Layer w0.2: v1(15.1,20.2) 14.6,20.2 5.45,11.05 5.45,10.05 v1(5.4,10) 7.2,10 9.055,11.855 15.684,11.855 15.689,11.85 25.85,11.85 27.1,13.1 27.1,18.6 26.9,18.8 v1(26.9,19.4) ; v1(18.256,-18.7) 24.741,-18.7 v1(28.441,-15)
  Top Layer w0.3: v1(-10.2,-1.2) -10.1,-1.2 -9.624,-1.676 -9.624,-2.224 -7.049,-4.8 v1(-6.4,-4.8) ; v1(3.1,-2.2) 3.362,-2.2 3.862,-2.7 7.7,-2.7 9.4,-1 10.3,-1 10.8,-1.5 v1(10.8,-1.9)
  Top Layer w0.4: v1(0.8,-4.125) L10.2@0.8,-2.925 L10.2@0.8,-2.9
  Bottom Layer w0.2: 2.75,-3.6 3.122,-3.6 3.172,-3.55 3.628,-3.55 3.95,-3.872 3.95,-4.05 5.2,-5.3 5.2,-5.6 6.7,-7.1 ; v1(28.441,-15) 28.441,-14.959 29.2,-14.2 29.2,-12.8 31.5,-10.5 31.5,-8.8 32.05,-8.25 S1.1@33.675,-8.25
  Bottom Layer w0.3: -11.1,-1.45 -10.85,-1.2 v1(-10.2,-1.2) -9.5,-1.9 R30.2@-9.5,-1.95 ; C11.2@-7.9,4.6 -7.1,4.6 -6.25,3.75 U3.48@-5.55,3.75 -4.8,3.75 -4.3,4.25 -4.3,4.4 ; v1@-6.2,-4.8 -4.5,-4.8 -3.75,-4.05 ; C10.2@-5.4,-7.7 -5.4,-6.4 -4.55,-5.55 U3.32@-3.75,-5.55 -3.75,-4.05 ; C9.2@3.05,-8 2.75,-7.7 U3.19@2.75,-5.55 2.75,-3.6 2.75,-3 ; 3.65,-2.25 2.9,-1.5 ; 4.3,7.3 3.75,6.75 U3.64@3.75,5.55 3.75,2.75 2.9,1.9 2.9,-1.5 ; U16.1@11.05,-14.775 11.05,-16.05 C46.2@11.2,-16.2 ; R6.2@13.9,20.25 14.05,20.4 14.25,20.2 v1(15.1,20.2) ; v1(26.9,19.4) 27.9,19.4 28.7,20.2 R4.2@29.2,20.2 ; -3.75,-4.05 -2.7,-3 -2.3,-3.4 -2.051,-3.4 -1.326,-4.125 v1(0.8,-4.125) 1.625,-4.125 2.75,-3 ; 2.75,-3 2.75,-1.65 2.9,-1.5
  Bottom Layer w0.35: U9.6@1.125,-22.7 1.125,-20.825
  Bottom Layer w0.4: U5.5@-10.75,-38.2 -10.75,-39.15 -10.5,-39.4 -8.9,-39.4 ; C13.2@-8.4,-37.5 -8.4,-38.9 -8.9,-39.4 ; C25.2@-1.3,-19.7 -1.3,-20.5 -1.2,-20.6 ; 0.9,-20.6 1.125,-20.825 ; 9.8,-24.7 9.8,-27.8 8.5,-29.1 8.5,-31.3 7.9,-31.9 6.7,-31.9 5.7,-32.9 5.7,-38.8 5.1,-39.4 -8.9,-39.4 ; v1(10.8,-1.9) 10.8,-2.86 L5.1@10.84,-2.9 ; R44.2@16.45,-17.3 16.45,-16.15 C39.1@16.6,-16 16.9,-15.7 U14.4@16.9,-14.05
  Bottom Layer w0.6: U12.5@3.05,13.325 3.05,11.6 C31.2@3.15,11.5 3.15,10.45 4.3,9.3 ; 4.3,7.3 C8.2@4.3,8.3 4.3,9.3 ; v1(5.4,10) 5,10 4.3,9.3 ; 11.2,-18.7 C46.2@11.2,-16.2 ; 16.45,-18.35 R44.2@16.45,-17.3
  Bottom Layer w0.8: 5.5,-9.4 5.88,-9.4 C32.2@6.465,-8.815 6.465,-8.137 6.651,-7.951
  Bottom Layer w1: -6,-9.225 -6,-11 -2.9,-14.1 -2.9,-19.8 -2.1,-20.6 -1.2,-20.6 0.9,-20.6 5.7,-20.6 9.8,-24.7 ; 5.5,-9.4 4.5,-9.4 3.1,-10.8 3.1,-11.569 10.231,-18.7 11.2,-18.7 16.1,-18.7 ; 16.45,-18.35 16.1,-18.7 ; v1(18.256,-18.7) 16.1,-18.7
5VCC: C14.2 C15.2 C19.2 C33.2 C34.2 C35.1 D4.2 R28.2 R41.2 T1.3 U4.20 U6.20 U7.2 U7.13 U8.5 | length 103
  Top Layer w0.8: v2(-10.3,-6.2) -9.6,-6.2 -3.3,-12.5 5.6,-12.5 6,-12.1 6,-9 5.05,-8.05 5.05,-7.148 5.648,-6.55 15.45,-6.55 21.3,-0.7 v2(21.4,-0.7)
  Bottom Layer w0.3: C14.2@20.375,-0.7 U4.20@22.15,1.075
  Bottom Layer w0.35: -14.925,7.025 U6.20@-14.925,7.95 ; C15.2@-13.65,5.75 C15.2@-13.1,5.75
  Bottom Layer w0.4: R41.2@-21.4,18.65 -21.4,17.9 -21,17.5 C33.2@-19.75,17.5 ; -12.825,17.475 U7.2@-10.65,17.475 -6.906,17.475 -5.606,18.775 U7.13@-4.75,18.775 -3.025,18.775 C19.2@-2.6,18.35
  Bottom Layer w0.5: C33.2@-19.75,17.5 C34.2@-18.1,17.5 ; D4.2@-16.8,19.5 D4.2@-16.6,19.5 ; C35.1@-14.7,18.25 C35.1@-14.7,18.35 -14.7,19.8 -13.7,20.8 -13.7,22.15 T1.3@-11.85,24
  Bottom Layer w0.6: C19.2@-2.6,18.35 C19.2@-2.4,18.35 -0.95,18.35 -0.15,19.15 R28.2@-0.15,19.8 -0.2,19.85 U8.5@-0.2,21.25
  Bottom Layer w0.8: C34.2@-18.1,17.5 C34.2@-17.783,17.437 ; C14.2@20.375,-0.7 v2(21.4,-0.7)
  Bottom Layer w1: C15.2@-13.1,5.75 -13.1,6.9 -12.5,7.5 -10.308,7.5 ; v2(-10.3,-6.2) -11,-5.5 -11,-3.9 -12.6,-2.3 -13.644,-2.3 -14.9,-1.044 -14.9,-0.3 -13.3,1.3 -12.3,1.3 -11.2,2.4 -11.2,5.9 -10.308,6.792 -10.308,7.192 -8.45,9.05 -8.45,10.85
5VUSB: C5.2 C6.2 C26.1 C27.2 C30.2 C36.2 C37.1 C38.1 D2.2 L8.2 L9.1 R2.1 T4.3 U1.7 U1.8 U2.7 U2.8 U10.1 U11.1 U12.1 U12.3 U13.4 U13.5 | length 150.4
  Top Layer w0.3: v1(-6.4,31.9) -6.4,32.8
  Top Layer w0.8: v2(-12.2,33.9) -10.9,33.9 -8.5,36.3 12.8,36.3 14,35.1 v2(15.1,35.1)
  Bottom Layer w0.3: v1(-6.4,31.9) -6.4,30.4 -6.05,30.05 R2.1@-5.5,30.05 ; 5.85,18.8 U11.1@5.85,20.675 ; C30.2@6.65,17.789 C30.2@6.73,17.85 ; U2.7@17.625,20.225 17.625,21.775 18.125,22.275 U2.8@18.125,20.225 ; U1.7@33,20.2 33,21.85 33.45,22.3 33.5,22.25 U1.8@33.5,20.2
  Bottom Layer w0.6: U10.1@-31.75,23.9 -31.75,25.4 C27.2@-31.85,25.5 -31.85,26.55 -30.6,27.8 -29.2,27.8 -26.8,30.2 ; U13.4@-22.55,23.9 U13.5@-20.65,23.9 -19.7,23.9 -19.5,24.1 ; -20.6,27.7 -20.35,27.45 C36.2@-20.35,25.9 -18.8,25.9 -17.9,25 ; -19.5,24.2 L9.1@-17.95,24.2 ; L9.1@-17.95,24.1 L9.1@-17.9,24.05 ; L9.1@-17.9,24.15 -17.9,25 ; -17.9,25.1 -17.9,25 ; U12.1@3.05,16.275 3.05,17.15 3.4,17.5 4.7,17.5 ; U12.3@4.95,16.275 4.95,17.25 4.7,17.5 ; C30.2@6.65,17.85 5.65,17.85 5.3,17.5 4.7,17.5 ; C30.2@6.73,17.85 C30.2@6.8,17.85 6.8,19.1 ; 26.4,27.4 T4.3@26.4,30.5
  Bottom Layer w0.8: -27.8,31.2 -26.8,30.2 -24.3,27.7 -20.6,27.7 ; C37.1@-13.4,36.3 C37.1@-13.1,36 ; -13.1,34.2 C37.1@-13.1,36 ; L8.2@-12.31,28.9 -12.2,29.01 v2(-12.2,33.9) -11.1,33.9 -11,33.8 -11,36 C37.1@-13.1,36 ; C30.2@6.65,17.789 C30.2@6.65,17.85 ; 7.5,19.4 C26.1@7.5,20.6 9.5,20.6 11.7,22.8 11.7,27.9 12.6,28.8 ; 13.1,34.3 C38.1@13.1,36 14.6,36 15.1,35.5 v2(15.1,35.1) 15.1,34.9 16.3,33.7 16.3,30.4 14.2,30.4 12.6,28.8 ; 16.6,26.7 16.3,27 15.6,27 14.4,27 12.6,28.8 ; C6.2@17.95,22.3 17.95,25.35 16.7,26.6 30.9,26.6 33.35,24.15 C5.2@33.35,22.3
  other v2: -27.5,31.5 13.7,33.7 15.1,33.7 -10.8,33.9 -10.8,35.3
Boot0: R29.1 S1.2 U3.60 | length 50.3
  Top Layer w0.2: v1(2,1.5) 2.3,1.5 3,0.8 3,-1.273 4.027,-2.3 7.495,-2.3 9.645,-0.15 13.017,-0.15 13.367,-0.5 15.7,-0.5 16.35,-1.15 v1(16.85,-1.15) ; v1(31.1,-1) 31.1,-5.6 v1(32.25,-6.75)
  Bottom Layer w0.2: R29.1@1.65,8.3 1.85,8.1 1.85,6.772 1.75,6.672 U3.60@1.75,5.55 1.75,4.528 1.55,4.328 1.55,3.972 1.4,3.822 1.4,3.1 2,2.5 v1(2,1.5) ; v1@16.672,-1.15 17.622,-2.1 23.105,-2.1 24.355,-3.35 28.9,-3.35 31.1,-1.15 v1(31.1,-1) ; v1(32.25,-6.75) S1.2@33.675,-6.75
Button0: U3.15 U9.16 | length 19.2
  Top Layer w0.3: v1(4.375,-18.3) 4.375,-17.625 7.85,-14.15 7.85,-7.95 v1(8.3,-7.5)
  Bottom Layer w0.3: v1(4.375,-18.3) U9.16@4.375,-17.6 ; U3.15@5.55,-3.25 6.686,-3.25 7.25,-3.814 7.25,-5.85 8.3,-6.9 v1(8.3,-7.5)
Button1: U3.16 U9.15 | length 19.6
  Top Layer w0.3: v1(3.7,-18.8) 3.7,-17.6 7.4,-13.9 v1(7.4,-7.4)
  Bottom Layer w0.3: v1(3.7,-18.8) 3.725,-18.775 U9.15@3.725,-17.1 ; U3.16@5.55,-3.75 6.55,-3.75 6.8,-4 6.8,-6.3 7.4,-6.9 v1(7.4,-7.4)
Button2: U3.17 U9.14 | length 16.9
  Top Layer w0.3: v1(3.075,-18.3) 3.075,-17.525 6.8,-13.8 6.8,-8.4 v1(5.9,-7.5)
  Bottom Layer w0.3: v1(3.075,-18.3) U9.14@3.075,-17.6 ; U3.17@3.75,-5.55 3.75,-6.45 4,-6.7 5.1,-6.7 v1(5.9,-7.5)
GND: B1.3 B1.4 C1.1 C2.1 C3.2 C4.2 C5.1 C6.1 C7.2 C8.1 C9.1 C10.1 C11.1 C12.1 C13.1 C14.1 C15.1 C16.2 C17.1 C18.1 C19.1 C20.1 C21.1 C22.1 C23.1 C24.1 C25.1 C26.2 C27.1 C28.1 C29.2 C30.1 C31.1 C32.1 C33.1 C34.1 C35.2 C36.1 C37.2 C38.2 C39.2 C42.1 C46.1 C47.1 H1.2 J2.6 J2.10 J2.11 J2.14 J2.15 J3.5 J3.S1 J3.S2 J3.S3 J3.S4 J4.A1B12 J4.B1A12 J4.S1 J4.S2 J4.S3 J4.S4 pad.34 Q1.2 Q1.4 R1.1 R3.2 R5.2 R29.2 R35.2 R37.1 R38.1 R39.2 R40.2 R42.1 R43.1 R46.1 S1.4 S1.5 S1.6 S1.7 T2.3 U1.3 U1.5 U1.6 U1.11 U1.12 U1.13 U1.15 U1.17 U2.3 U2.5 U2.6 U2.11 U2.12 U2.13 U2.15 U2.17 U3.12 U3.18 U3.31 U3.47 U3.63 U4.1 U4.10 U4.19 U5.2 U6.1 U6.10 U6.19 U7.3 U7.14 U8.3 U9.10 U10.2 U11.5 U12.2 U13.2 U14.11 U15.2 U15.3 U16.2 | length 73.7
  Top Layer w0.3: C47.1@-2.3,0.7 C47.1@-2.2,0.8 ; -1.432,1.23 U15.2@-0.85,1.23
  Bottom Layer w0.3: U10.2@-30.8,23.9 -30.8,24.5 -30.35,24.95 C27.1@-30.35,25.5 ; C33.1@-19.75,14.9 C34.1@-17.75,14.9 ; -7.614,-34.2 -7.464,-34.05 -6.95,-34.05 -6.7,-33.8 ; -6.5,-32.3 -3.9,-29.7 C24.1@-2,-29.7 C23.1@0,-29.7 C22.1@2,-29.7 ; -5.8,17.8 -5.475,18.125 U7.14@-4.75,18.125 -3.925,18.125 -2.65,16.85 C19.1@-2.4,16.85 ; -4.4,-10.3 -4.4,-8.4 -4,-8 C10.1@-4,-7.7 -3.25,-6.95 U3.31@-3.25,-5.55 ; C8.1@2.9,8.3 2.9,7.1 3.25,6.75 U3.63@3.25,5.55 3.25,3.906 ; v1(3.4,-7) 3.25,-6.85 U3.18@3.25,-5.55 3.25,-4.25 v1(3.4,-4.1) ; U3.12@5.55,-1.75 7.2,-1.75 ; 9,-1.9 v1(9.5,-1.9) ; U2.3@15.9,19 U2.17@17.125,19 ; U2.5@16.625,20.225 U2.6@17.125,20.225 U2.17@17.125,19 ; 17.125,16.593 U2.15@17.125,17.275 17.125,18.5 v3(17.375,18.75) ; U2.13@18.125,17.275 18.125,18 U2.17@17.625,18.5 ; U2.12@18.85,18 U2.11@18.85,18.5 U2.17@17.625,18.5 ; U1.3@31.275,18.975 U1.17@32.5,18.975 ; U1.5@32,20.2 U1.6@32.5,20.2 U1.17@32.5,18.975 ; U1.15@32.5,17.25 32.5,18.475 v3(32.75,18.725) ; U1.13@33.5,17.25 33.5,17.975 U1.17@33,18.475 ; U1.12@34.225,17.975 U1.11@34.225,18.475 U1.17@33,18.475 ; U2.17@17.125,19 v3(17.375,18.75) ; v3(17.375,18.75) U2.17@17.625,18.5 ; U1.17@32.5,18.975 v3(32.75,18.725) ; v3(32.75,18.725) U1.17@33,18.475
  Bottom Layer w0.4: U5.2@-10.75,-35.4 U5.2@-10.75,-35.2 -10.75,-34.55 -10.4,-34.2 -8.6,-34.2 ; -8.8,-23.8 -8.8,-26.5 -8.5,-26.8 -8.5,-31.5 -8.1,-31.9 -6.9,-31.9 -6.5,-32.3 -6.5,-33.6 -6.7,-33.8 ; C13.1@-8.4,-36.3 C13.1@-8.4,-36.1 -8.4,-34.4 -8.6,-34.2 ; -7.614,-34.2 -8.6,-34.2 ; C46.1@9.8,-16.2 10.4,-15.6 U16.2@10.4,-14.775
  Bottom Layer w0.6: -23.2,32.5 J4.A1B12@-23.2,33.675 ; -16.8,32.5 J4.B1A12@-16.8,33.675
  other v1: -38,-25 -36,-25 36,-25 38,-25 -39,-23 -37,-23 -35,-23 -33,-23 -31,-23 -29,-23 -27,-23 -25,-23 -23,-23 -21,-23 -19,-23 -17,-23 -15,-23 -9,-23 -7,-23 -5,-23 15,-23 17,-23 19,-23 21,-23 23,-23 25,-23 27,-23 29,-23 31,-23 33,-23 35,-23 37,-23 -38,-21 -32,-21 -28,-21 -26,-21 -24,-21 -22,-21 -20,-21 -18,-21 -16,-21 -10,-21 -8,-21 8,-21 24,-21 26,-21 28,-21 32,-21 34,-21 36,-21 38,-21 -39,-19 -37,-19 -31,-19 -29,-19 -27,-19 -25,-19 -23,-19 -21,-19 -19,-19 -11,-19 -9,-19 1,-19 27,-19 29,-19 31,-19 33,-19 35,-19 37,-19 -38,-17 -36,-17 -34,-17 -32,-17 -28,-17 -26,-17 -24,-17 -22,-17 -20,-17 -16,-17 -10,-17 -8,-17 -6,-17 -4,-17 14,-17 22,-17 28,-17 32,-17 34,-17 36,-17 38,-17 8.7,-15.4 -39,-15 -37,-15 -35,-15 -33,-15 -31,-15 -29,-15 -27,-15 -25,-15 -23,-15 -17,-15 -15,-15 -13,-15 -9,-15 -7,-15 -5,-15 -1,-15 1,-15 23,-15 31,-15 33,-15 35,-15 37,-15 9.7,-13.6 -38,-13 -36,-13 -34,-13 -32,-13 -28,-13 -26,-13 -24,-13 -20,-13 -18,-13 -16,-13 -14,-13 -12,-13 -6,-13 24,-13 26,-13 32,-13 34,-13 36,-13 38,-13 16,-11.5 18.3,-11.5 -39,-11 -37,-11 -35,-11 -33,-11 -31,-11 -27,-11 -21,-11 -19,-11 -17,-11 -15,-11 -13,-11 -11,-11 11,-11 33,-11 35,-11 37,-11 3.1,-9.2 -38,-9 -36,-9 -34,-9 -32,-9 0,-9 38,-9 11.1,-8.9 -23.1,-7.7 -39,-7 -37,-7 -31,-7 -3.4,-7 23,-7 37,-7 -27.3,-5.8 -38,-5 -36,-5 -32,-5 -18,-5 -16,-5 -14,-5 22,-5 32,-5 34,-5 38,-5 -27.3,-3.8 12.5,-3.3 -39,-3 -37,-3 -35,-3 -33,-3 -31,-3 -17,-3 -15,-3 23,-3 -27.3,-1.8 14.7,-1.8 16.2,-1.8 -38,-1 -36,-1 -34,-1 -32,-1 -16,-1 12,-1 28,-1 36,-1 38,-1 -27.3,0.2 -39,1 -37,1 -35,1 -33,1 -31,1 35,1 -27.3,2.2 -38,3 -36,3 -32,3 -13.1,3 28,3 36,3 38,3 -8.9,3.2 -6.9,3.2 -39,5 -37,5 -35,5 -33,5 -31,5 35,5 -21,5.8 -7.5,6.9 -38,7 -36,7 -32,7 28,7 36,7 38,7 -39,9 -37,9 -35,9 9,9 11,9 22.5,9 29,9 31,9 35,9 37,9 0.3,9.2 -2.6,10.2 -32,11 -12,11 -6,11 38,11 -39,13 -35,13 -33,13 -31,13 -7,13 -5,13 9,13 11,13 13,13 35,13 -22.9,13.6 -0.7,13.8 1.1,13.8 -36,15 -34,15 -32,15 -10,15 -8,15 4,15 6,15 8,15 12,15 16,15 18.7,15 34,15 1.1,15.6 -39,17 -35,17 -33,17 -31,17 -23,17 9,17 19,17 24,18 -34,19 -24,19 -8,19 2,19 10,19 12,19 -39,21 -37,21 -35,21 -33,21 -15,21 31,21 28.5,21.4 -38,23 -36,23 -34,23 -24,23 -16,23 22,23.7 35.1,23.8 16,24 31.3,24.2 -39,25 -37,25 -35,25 -23,25 -13,25 -11,25 1,25 3,25 9,25 21,25 23,25 -38,27 -36,27 -34,27 8,27 10,27 4,27.5 39,28 -39,29 -37,29 -35,29 -33,29 -31,29 -7,29 9,29 37,29 38,29 -15.5,29.2 -24,30 5.5,30.5 -24,31 -8,31 2,31 -26,32 -24,32 -29,33 -14,33 -3,33 27,33 29,33 -26,34 24,35 26,35 28,35 -29,37 19,37 21,37 25,37 27,37 29,37 -22.5,38.5 -20,38.5 -17.5,38.5
I2S_BCLK: U1.16 U2.16 U3.21 | length 89.7
  Top Layer w0.3: v1(30.5,13.6) 30.5,14.3 32,15.8 v1(32,16.1)
  Bottom Layer w0.3: U3.21@1.75,-5.55 1.75,-11.986 9.714,-19.95 21.286,-19.95 27.8,-13.436 27.8,-6.336 32.5,-1.636 32.5,11.6 v1(30.5,13.6) 17.4,13.6 16.625,14.375 U2.16@16.625,17.275 ; v1(32,16.1) U1.16@32,17.25
I2S_LRCK: U1.14 U2.14 U3.20 | length 90.2
  Top Layer w0.3: v1(16.6,13.2) 16.2,13.6 16.2,14 17.6,15.4 v1(17.6,16.1) ; v1(30.5,12.7) 30.5,12.752 33,15.252 v1(33,16.1)
  Bottom Layer w0.3: U3.20@2.25,-5.55 2.25,-11.85 9.9,-19.5 21.1,-19.5 27.35,-13.25 27.35,-6.15 32,-1.5 32,11.1 30.5,12.6 v1(30.5,12.7) 30.4,12.7 29.95,13.15 16.65,13.15 v1(16.6,13.2) ; v1(17.6,16.1) 17.625,16.125 U2.14@17.625,17.275 ; v1(33,16.1) U1.14@33,17.25
I2S_SD: U1.1 U2.1 U3.23 | length 95.6
  Top Layer w0.3: v1(15.9,16.7) 18.3,16.7 v1(20.1,14.9)
  Bottom Layer w0.3: U3.23@0.75,-5.55 0.75,-12.259 9.341,-20.85 21.659,-20.85 28.7,-13.809 28.7,-6.8 33.5,-2 33.5,12.4 30.7,15.2 30.509,15.2 ; v1(15.9,16.7) 15.7,16.7 15.4,17 15.4,17.5 U2.1@15.9,18 ; v1(20.1,14.9) 22.464,14.9 24.464,16.9 26.4,16.9 28.1,15.2 30.509,15.2 ; U1.1@31.275,17.975 30.675,17.975 30.509,17.809 30.509,15.2